# Altium PCB USBDM_Kinetis-CS.PcbDoc
Units mil, origin at the board's own origin, x right, y up, seen from the top; angles counter-clockwise.
Board outline 2329.41 x 820 mil, 2 copper layers (Top Layer, Bottom Layer); 60 components, 70 nets, 253 pads, 122 vias.
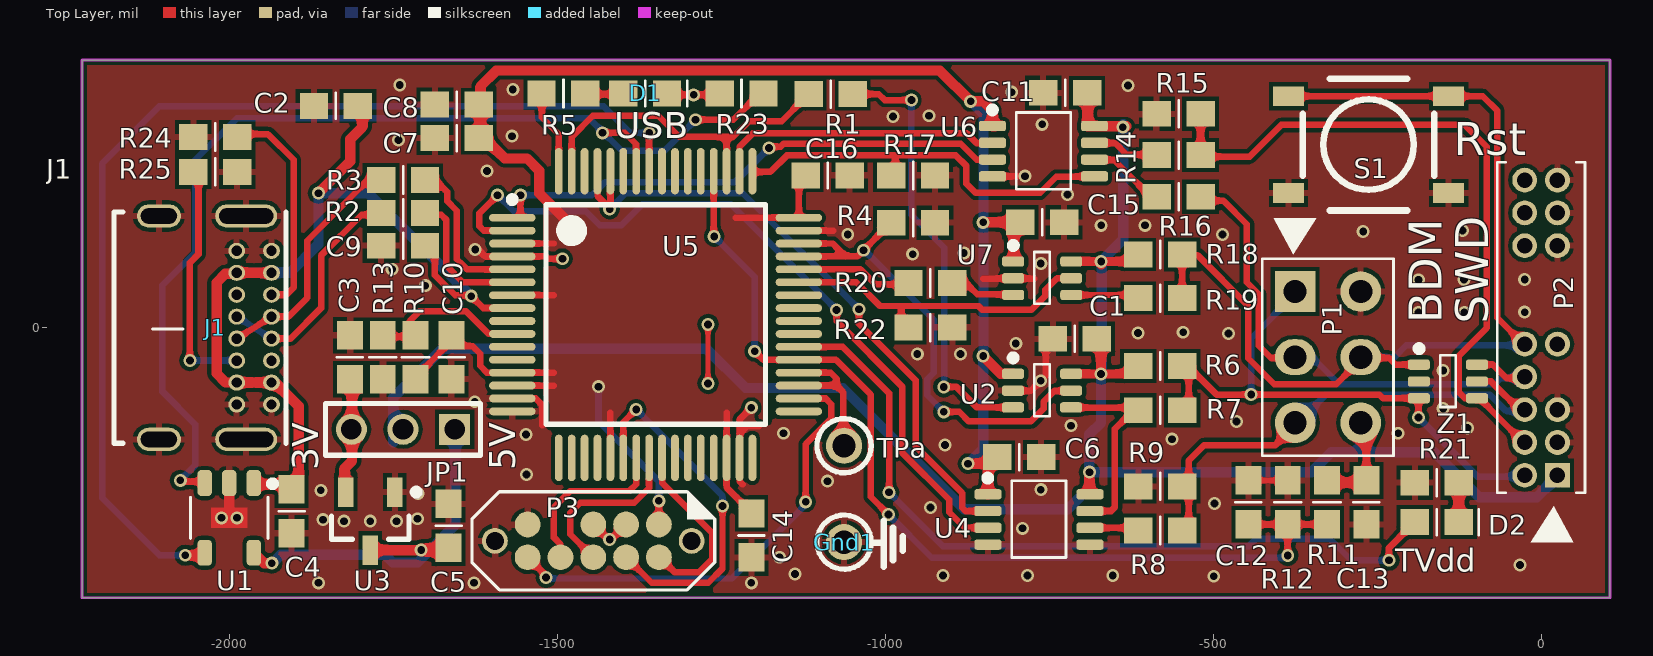
[diagram p0: Top Layer view]
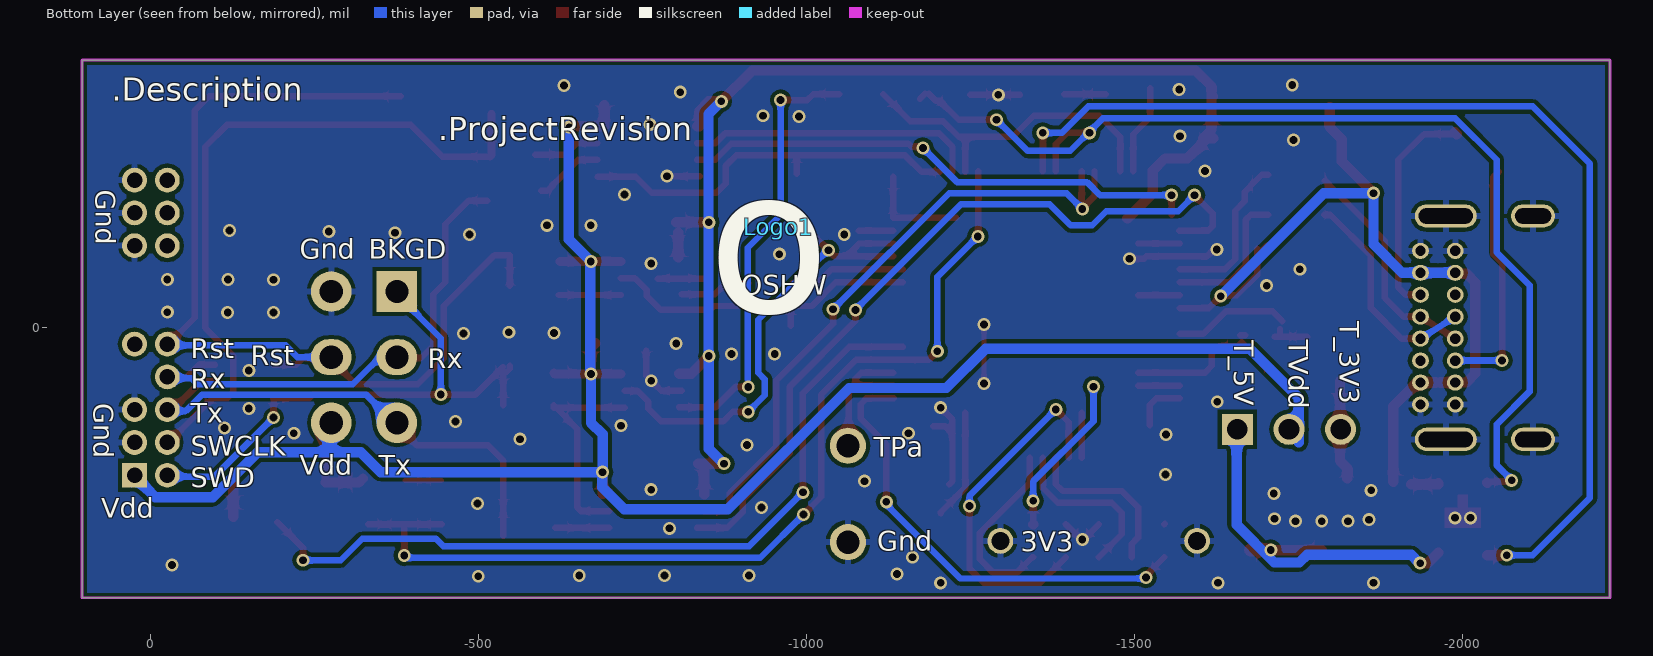
[diagram p1: Bottom Layer view, seen from below]
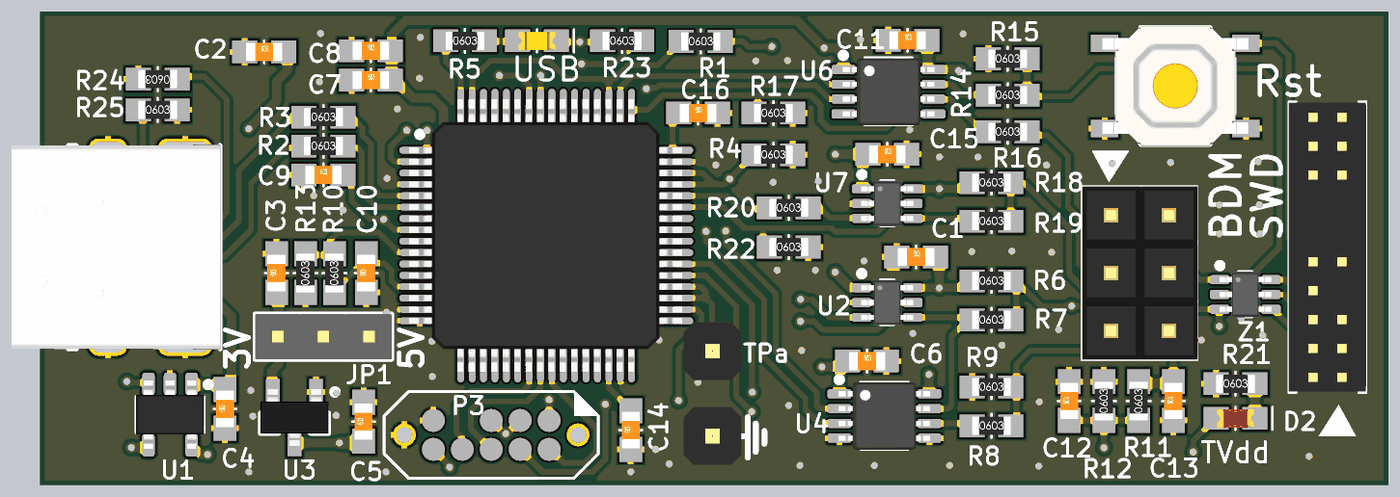
[diagram p2: 3D render of the assembled board from above, using the file's embedded part models]

## Layer stack, top to bottom
Top Solder: solder mask 0.4, Solder Resist, Dk 3.5
Top Layer: signal copper 1.4
Dielectric 1: dielectric 12.6, FR-4, Dk 4.8
Bottom Layer: signal copper 1.4
Bottom Solder: solder mask 0.4, Solder Resist, Dk 3.5

## Board outline
-2224.41,-411.97 105,-411.97 105,408.03 -2224.41,408.03

## Design rules (kind name [scope] priority, off if disabled: settings)
AssemblyTestPointUsage SilkToBoardRegionClearance_1 [All] p2:
AssemblyTestPointUsage SilkToBoardRegionClearance [All] p3:
Clearance [All] p1: gap=6 ignorepadtopadclearanceinfootprint=FALSE except(0: Arc-Hole Track-Hole SMDPad-Hole THPad-Hole Via-Hole Fill-Hole Poly-Hole Region-Hole Text-Hole)
HoleSize [All] p1: absolutevalues=TRUE maxlimit=250 minlimit=11.81 maxpercent=80.000 minpercent=20.000
MatchedLengths DiffPair_DIFF100MatchedLengths [InDifferentialPairClass('DIFF100')] p1: tolerance=6 checknetsindiffpair=TRUE checkdiffpairvsdiffpair=FALSE checkxsignals=FALSE checkothers=FALSE
MinimumAnnularRing [All] p1: minimumring=3
MinimumSolderMaskSliver [All] p1 off: minsoldermaskwidth=3.94
MinimumSolderMaskSliver SilkscreenOverComponentPads_2 [All] p2 off: minsoldermaskwidth=10
MinimumSolderMaskSliver SilkToSolderMaskClearance_1 [IsPad] p3 off: minsoldermaskwidth=10
MinimumSolderMaskSliver SilkscreenOverComponentPads_1 [All] p4 off: minsoldermaskwidth=10
MinimumSolderMaskSliver SilkToSolderMaskClearance [IsPad] p5 off: minsoldermaskwidth=10
MinimumSolderMaskSliver SilkscreenOverComponentPads [All] p6 off: minsoldermaskwidth=10
PlaneClearance [All] p1: clearance=10
PlaneConnect [All] p1: planeconnectstyle=Relief reliefexpansion=20 reliefentries=4 reliefconductorwidth=10 reliefairgap=6
PolygonConnect PolygonConnect_Via [IsVia] p1: connectstyle=Direct reliefconductorwidth=10 reliefentries=4 polygonreliefangle="90 Angle" airgapwidth=10
PolygonConnect [All] p2: connectstyle=Relief reliefconductorwidth=10 reliefentries=4 polygonreliefangle="90 Angle" airgapwidth=6
RoomDefinition USBDM_Kinetis [InComponentClass('USBDM_Kinetis')] p1: confinementstyle=ConfineIn formatcopy=TRUE lockcomponents=FALSE outline -2332.68,-429.13 116.14,-429.13 116.14,436.02 -2332.68,436.02
RoutingVias [All] p1: holewidth=12 width=25 viastyle="Through Hole" minholewidth=12 minwidth=25 maxholewidth=28 maxwidth=50
SilkToBoardRegionClearance SilkToBoardRegionClearance_2 [All] p1 off:
SilkToSilkClearance [All] p1 off: silktosilkclearance=10
SilkToSolderMaskClearance SilkToSolderMaskClearance_2 [IsPad] p1 off: minsilkscreentomaskgap=10 clearancetoexposedcopper=TRUE
SolderMaskExpansion [All] p1: expansion=4 istentingtop=FALSE
Width [All] p1: maxlimit=118.11 minlimit=5.91 preferedwidth=9.84
23 further rules are at their usual default settings.

## Components (designator, comment, footprint, x,y, rotation, side; value= is the part's Value field where it differs from the comment)
C1 "100nF" CCNP1608-0603 -710.83,-16.97 r0 top
C2 "10uF 10V" CCNP1608-0603 -1837.36,338.03 r0 top
C3 "4.7uF 16V" CCNP1608-0603 -1816,-45 r90 top
C4 "100nF" CCNP1608-0603 -1905,-279.97 r90 top
C5 "4.7uF 16V" CCNP1608-0603 -1665.64,-302.13 r90 top
C6 "100nF" CCNP1608-0603 -795.64,-197.34 r0 top
C7 "4.7uF 16V" CCNP1608-0603 -1653,289.03 r0 top
C8 "100nF" CCNP1608-0603 -1653,340.03 r0 top
C9 "100nF" CCNP1608-0603 -1735,125 r0 top
C10 "100nF" CCNP1608-0603 -1661,-45 r90 top
C11 "100nF" CCNP1608-0603 -725.64,358.03 r0 top
C12 "100nF" CCNP1608-0603 -446.27,-266.34 r90 top
C13 "4.7uF 16V" CCNP1608-0603 -266.27,-266.34 r90 top
C14 "100nF" CCNP1608-0603 -1203.95,-316.78 r90 top
C15 "100nF" CCNP1608-0603 -760.64,160.66 r0 top
C16 "100nF" CCNP1608-0603 -1087.64,232.03 r0 top
D1 "LED Green" LED1608-0603-GREEN -1366.01,357.03 r180 top
D2 "LED Red" LED1608-0603-RED -159.01,-296.34 r180 top
Gnd1 "TP" "PCBPIN - 0.9MM" -1062.64,-326.97 r0 top
J1 "USB4085-GF-A" ? -2094,0 r0 top
JP1 "Header 1x3 2mm" "HEADER 1X3 (2MM)" -1735,-155 r270 top
Logo1 "OSHW Logo" OSHW -957.01,153.03 r180 bottom
P1 "BDM Connector" BDM -375,55.03 r270 top
P2 "SWD-2x10 (reduced pins)" "SWD-2X10 - REDUCED" 25,-225 r90 top
P3 "SWD Connector 2x5-Pin" SWD-2X5-JIG-PADS -1345,-300 r180 top
R1 "1K" CR1608-0603 -1083.01,356.03 r0 top
R2 "33R0" CR1608-0603 -1735,175 r0 top
R3 "33R0" CR1608-0603 -1735,225 r0 top
R4 "10K" CR1608-0603 -957.45,160.03 r0 top
R5 "1K" CR1608-0603 -1490.45,357.03 r0 top
R6 "100K" CR1608-0603 -580.64,-58.34 r0 top
R7 "47R" CR1608-0603 -580.64,-125.97 r0 top
R8 "47R" CR1608-0603 -580.64,-309.34 r0 top
R9 "100K" CR1608-0603 -580.64,-241.97 r0 top
R10 "100K" CR1608-0603 -1716,-45 r90 top
R11 "10K" CR1608-0603 -326.27,-266.34 r90 top
R12 "10K" CR1608-0603 -386.27,-266.34 r90 top
R13 "0R" CR1608-0603 -1766,-45 r90 top
R14 "47R" CR1608-0603 -552.64,263.03 r0 top
R15 "100K" CR1608-0603 -552.64,326.03 r0 top
R16 "47R" CR1608-0603 -552.64,199.66 r0 top
R17 "10K" CR1608-0603 -957.45,232.03 r0 top
R18 "100K" CR1608-0603 -580.64,111.66 r0 top
R19 "47R" CR1608-0603 -580.64,45.03 r0 top
R20 "1K" CR1608-0603 -931,68.03 r0 top
R21 "1K" CR1608-0603 -159.01,-236.34 r0 top
R22 "10K" CR1608-0603 -931,0.03 r0 top
R23 "10K" CR1608-0603 -1219.01,357.03 r0 top
R24 "5.1K" CR1608-0603 -2021.34,290.72 r180 top
R25 "5.1K" CR1608-0603 -2021.34,237.55 r0 top
S1 "SMD-SW-4_5.1x5.1x2.0_M" SMD-SW-4_5.1x5.1x2.0_M -263.01,279.03 r0 top
TPa "TP" "PCBPIN - 0.9MM" -1062.64,-180 r0 top
U1 "MIC2005A-1YM5-TR" SOT23-5-Power -2000,-289.97 r90 top
U2 "SN74LVC1T45DCKT" SC70_N -760.83,-95.97 r0 top
U3 "XC6206P332MR" SOT23_N -1785,-295 r90 top
U4 "SN74LVC2T45DCTR" SSOP8_N -765.64,-292.34 r0 top
U5 "MK22FN512VLH12" TSQFP50P1200X1200-64N -1350,20 r0 top
U6 "SN74LVC2T45DCTR" SSOP8_N -758.64,269.03 r0 top
U7 "SN74LVC1T45DCKT" SC70_N -760.64,75.38 r0 top
Z1 "SMF05CT1G" SC70_N -142.01,-81.97 r0 top

## Footprints (in the part's own frame and the unit in brackets; to place one, negate y for a bottom-side part, rotate by r counter-clockwise, add the part's x,y. Pads: shape width x height; smd on the part's side, far side on the other; paste and mask are expansions set on the pad)
BDM [mil] "HCS12 style BDM connector"
  rect 62x62 hole 35.43: 1(0,0)
  round 62 hole 35.43: 2(0,100) 5(200,0) 6(200,100)
  oval 55x62 hole 35.43: 3(100,0) 4(100,100)
  silkscreen extent -112,-50 250,150, body extent -50,-49 250,151, height 333
CCNP1608-0603 [mm]
  rect 1.1x1 smd: 1(-0.85,0) 2(0.85,0)
  silkscreen extent 0,-0.5 0,0.5, body extent -0.8,-0.4 0.8,0.4, height 0.3
CR1608-0603 [mm]
  rect 1.1x1 smd: 1(-0.85,0) 2(0.85,0)
  silkscreen extent 0,-0.53 0,0.53, body extent -0.85,-0.4 0.85,0.4, height 0.56
"HEADER 1X3 (2MM)" [mm]
  rect 1.2x1.2 hole 0.8: 1(0,2)
  round 1.2 hole 0.8: 2(0,0) 3(0,-2)
  silkscreen extent -1,-3 1,3, body extent -1,-3 1,3, height 5
LED1608-0603-GREEN [mm] "SMT-LED 0603"
  rect 1.1x1 smd: A(0.85,0) K(-0.85,0)
  silkscreen extent -1.62,-0.5 0,0.5, body extent -0.8,-0.4 0.8,0.4, height 0.7
LED1608-0603-RED [mm] "SMT-LED 0603"
  rect 1.1x1 smd: A(0.85,0) K(-0.85,0)
  silkscreen extent -1.62,-0.5 0,0.5, body extent -0.8,-0.4 0.8,0.4, height 0.7
OSHW [mil] "OSHW Logo"
"PCBPIN - 0.9MM" [mm]
  round 1.4 hole 0.9: 1(0,0)
  silkscreen extent -1.05,-1.05 1.05,1.05, body extent -1.27,-1.27 1.27,1.27, height 6
SC70_N [mm] "SC70, 6-Leads, Body 2.15x1.4mm, Pitch 0.65mm, IPC Medium Density"
  rrect50% 0.85x0.4 smd: 1(-1.125,0.65) 2(-1.125,0) 3(-1.125,-0.65) 4(1.125,-0.65) 5(1.125,0) 6(1.125,0.65)
  silkscreen extent -1.24,-0.99 0.3,1.39, body extent -1.14,-1 1.14,1, height 1.1
SMD-SW-4_5.1x5.1x2.0_M [mm] "Miniature SMD PCB Push Button - C318888"
  rect 1.2x0.762 smd: 1(3.1,-1.875) 1b(-3.1,-1.875) 2(3.1,1.875) 2b(-3.1,1.875)
  silkscreen extent -2.55,-2.55 2.55,2.55, body extent -3.2,-2.65 3.2,2.65, height 2
SOT23-5-Power [mm]
  rrect50% 1x0.55 smd: 1(1.35,-0.95) 2(1.35,0) 3(1.35,0.95) 4(-1.35,0.95) 5(-1.35,-0.95)
  Top Layer region: 0.9,-0.2 0.9,0.2 -0.1,0.2 -0.1,-0.2
  Top Layer region: 0.4,0.7 -0.4,0.7 -0.4,-0.7 0.4,-0.7
  silkscreen extent -0.8,-1.8 1.45,1.5, body extent -1.5,-1.5 1.5,1.5, height 1.45
SOT23_N [mm] "SOT23, 3-Leads, Body 2.9x1.3mm, Pitch 0.95mm, Lead Span 2.3mm - IPC Medium Density"
  rect 1.15x0.6 smd: 1(1.125,-0.95) 2(1.125,0.95) 3(-1.125,0)
  silkscreen extent -0.7,-1.9 1.25,1.5, body extent -1.25,-1.5 1.25,1.5, height 1.05
SSOP8_N [mm] "SSOP, 8-Leads, Body 2.9x3.2mm, Pitch 0.65mm, IPC Medium Density"
  rrect50% 1.05x0.4 smd: 1(-1.975,0.975) 2(-1.975,0.325) 3(-1.975,-0.325) 4(-1.975,-0.975) 5(1.975,-0.975) 6(1.975,-0.325) 7(1.975,0.325) 8(1.975,0.975)
  silkscreen extent -2.11,-1.47 1.05,1.73, body extent -2.01,-1.47 2.01,1.48, height 1.3
SWD-2X5-JIG-PADS [mm] "Connector; SWD; 2x5 Position"
  round 1 hole 0.7: 0(-1.27,0.635) 0(6.35,0.635)
  round 1 smd: 1(0,0) 2(0,1.27) 3(1.27,0) 4(1.27,1.27) 5(2.54,0) 6(2.54,1.27) 8(3.81,1.27) 9(5.08,0) 10(5.08,1.27)
  silkscreen extent -2.16,-1.26 7.24,2.53
"SWD-2X10 - REDUCED" [mm] "Connector; SWD; 2x10 Position"
  rect 0.96x0.96 hole 0.6: 1(0,0)
  round 0.96 hole 0.6: 2(0,1.27) 3(1.27,0) 4(1.27,1.27) 5(2.54,0) 6(2.54,1.27) 8(3.81,1.27) 9(5.08,0) 10(5.08,1.27) 15(8.89,0) 16(8.89,1.27) 17(10.16,0) 18(10.16,1.27) 19(11.43,0) 20(11.43,1.27)
  silkscreen extent -2.6,-1.06 12.11,2.34, body extent -0.64,-1.06 12.06,2.34, height 4.5
TSQFP50P1200X1200-64N [mm] "Thin QFP, 64-Leads, Body 10x10mm, Pitch 0.5mm, IPC Medium Density"
  oval 1.8x0.3 smd: 1(-5.55,3.75) 2(-5.55,3.25) 3(-5.55,2.75) 4(-5.55,2.25) 5(-5.55,1.75) 6(-5.55,1.25) 7(-5.55,0.75) 8(-5.55,0.25) 9(-5.55,-0.25) 10(-5.55,-0.75) 11(-5.55,-1.25) 12(-5.55,-1.75) 13(-5.55,-2.25) 14(-5.55,-2.75) 15(-5.55,-3.25) 16(-5.55,-3.75) 33(5.55,-3.75) 34(5.55,-3.25) 35(5.55,-2.75) 36(5.55,-2.25) 37(5.55,-1.75) 38(5.55,-1.25) 39(5.55,-0.75) 40(5.55,-0.25) 41(5.55,0.25) 42(5.55,0.75) 43(5.55,1.25) 44(5.55,1.75) 45(5.55,2.25) 46(5.55,2.75) 47(5.55,3.25) 48(5.55,3.75)
  oval 0.3x1.8 smd: 17(-3.75,-5.55) 18(-3.25,-5.55) 19(-2.75,-5.55) 20(-2.25,-5.55) 21(-1.75,-5.55) 22(-1.25,-5.55) 23(-0.75,-5.55) 24(-0.25,-5.55) 25(0.25,-5.55) 26(0.75,-5.55) 27(1.25,-5.55) 28(1.75,-5.55) 29(2.25,-5.55) 30(2.75,-5.55) 31(3.25,-5.55) 32(3.75,-5.55) 49(3.75,5.55) 50(3.25,5.55) 51(2.75,5.55) 52(2.25,5.55) 53(1.75,5.55) 54(1.25,5.55) 55(0.75,5.55) 56(0.25,5.55) 57(-0.25,5.55) 58(-0.75,5.55) 59(-1.25,5.55) 60(-1.75,5.55) 61(-2.25,5.55) 62(-2.75,5.55) 63(-3.25,5.55) 64(-3.75,5.55)
  silkscreen extent -5.67,-4.25 4.25,4.57, body extent -6.02,-6 5.98,6, height 1.6
? [mm] "USB-C Connector"
  oval 0.65x0.62 hole 0.4: A1(4.025,2.975) A4(4.025,2.125) A5(4.025,1.275) A6(4.025,0.425) A7(4.025,-0.425) A8(4.025,-1.275) A9(4.025,-2.125) A12(4.025,-2.975) B1(2.675,-2.975) B4(2.675,-2.125) B5(2.675,-1.275) B6(2.675,-0.425) B7(2.675,0.425) B8(2.675,1.275) B9(2.675,2.125) B12(2.675,2.975)
  oval 1.7x0.9 hole 0.6 slot 1.4 at 0 deg: SH(-0.335,-4.325) SH(-0.335,4.325)
  oval 2.4x0.9 hole 0.6 slot 2.1 at 0 deg: SH(3.045,-4.325) SH(3.045,4.325)
  silkscreen extent -2.07,-4.47 4.58,4.47, body extent -4.56,-4.52 4.61,4.51, height 3.46

## Part data
C1 C4 C6 C8 C9 C10 C11 C12 C14 C15 C16: library part Cap_CCNP_0603_100nF, "Capacitor non-polar SMT 0603", LCSC=C14663, Manufacturer="Generic Components", Class=Passive, Published=08/06/2000, Publisher="Altium Hobart Technology Centre", SubClass=Capacitor
C2: library part Cap_CCNP_0603, "Capacitor non-polar SMT 0603", LCSC=C19702, Manufacturer="Generic Components", Class=Passive, Published=08/06/2000, Publisher="Altium Hobart Technology Centre", SubClass=Capacitor
C3 C5 C7 C13: library part Cap_CCNP_0603, "Capacitor SMT 0603", LCSC=C19666, Manufacturer="Generic Components", Class=Passive, Published=08/06/2000, Publisher="Altium Hobart Technology Centre", SubClass=Capacitor
D1: library part LED-0603-Green, "LED 0603 Green", LCSC=C72043, Manufacturer="Generic Components", Class I=Optoelectronic, Class II=LED, Farnell PN=1581242, Published=8-Jun-2000, Publisher="Altium Limited", Revision="July-2002: Re-released for DXP Platform."
D2: library part LED-0603-Red, "LED 0603 Red", LCSC=C2286, Manufacturer="Generic Components", Class I=Optoelectronic, Class II=LED, Farnell PN=1581239, Published=8-Jun-2000, Publisher="Altium Limited", Revision="July-2002: Re-released for DXP Platform."
Gnd1 TPa: "Test Point"
J1: "USB-C, USB 2.0 Receptacle Connector 16 Position Through Hole, Right Angle", Digikey Part Number=2073-USB4085-GF-ACT-ND, Angle=90, Digikey=2073-USB4085-GF-ACT-ND, Digikey Link=https://www.digikey.ee/product-detail/en/gct/USB4085-GF-A/2073-USB4085-GF-ACT-ND/9859733, Farnell PN=2924867, Part Number=USB4085-GF-A
JP1: "Header, 1x3, 2mm", Manufacturer="Generic Components", Class I=Connector, Publisher="Altium Limited", Revision="July-2002: Re-released for DXP Platform."
P1: library part BDM2X3, "HCS BDM connector (2x3 0.1\")"
P2: library part SWD2X10-Reduced, "SWD Connector 2x10-Pin (reduced pins)", Farnell PN=1865289, LatestRevisionDate=17-Jul-2002, LatestRevisionNote="Re-released for DXP Platform.", Publisher="Altium Limited"
P3: library part SWD2X5_JIG, Farnell PN=1865285, LatestRevisionDate=17-Jul-2002, LatestRevisionNote="Re-released for DXP Platform.", Publisher="Altium Limited"
R1 R5 R20 R21: library part Res, "Resistor SMT 0603", LCSC=C21190, Manufacturer="Generic Components", Class=Passive, Published=08/06/2000, Publisher="Altium Hobart Technology Centre", SubClass=Resistor
  R1 R20: Farnell PN=2331727
  R5 R21: Farnell PN=2502447
R2 R3: library part Res, "Resistor SMT 0603", LCSC=C23140, Manufacturer="Generic Components", Class=Passive, Farnell PN=1632431, Published=08/06/2000, Publisher="Altium Hobart Technology Centre", SubClass=Resistor
R4 R11 R12 R17 R22 R23: library part Res, "Resistor SMT 0603", LCSC=C25804, Manufacturer="Generic Components", Class=Passive, Farnell PN=1799366, Published=08/06/2000, Publisher="Altium Hobart Technology Centre", SubClass=Resistor
R6 R9 R15 R18: library part Res, "Resistor SMT 0603", LCSC=C25803, Manufacturer="Generic Components", Class=Passive, Farnell PN=9238727, Published=08/06/2000, Publisher="Altium Hobart Technology Centre", SubClass=Resistor
R7 R8 R14 R16 R19: library part Res, "Resistor SMT 0603", LCSC=C23182, Manufacturer="Generic Components", Class=Passive, Farnell PN=1646283, Published=08/06/2000, Publisher="Altium Hobart Technology Centre", SubClass=Resistor
R10: library part Res_CR0603, "Resistor SMT 0603", LCSC=C25803, Manufacturer="Generic Components", Class=Passive, Farnell PN=9238727, Published=08/06/2000, Publisher="Altium Hobart Technology Centre", SubClass=Resistor
R13: library part Res_CR0603, "Resistor SMT 0603", LCSC=C21189, Manufacturer="Generic Components", Class=Passive, Farnell PN=2668260, Published=08/06/2000, Publisher="Altium Hobart Technology Centre", SubClass=Resistor
R24 R25: library part Res_CR0603, "Resistor SMT 0603", LCSC=C23186, Manufacturer="Generic Components", Class=Passive, Published=08/06/2000, Publisher="Altium Hobart Technology Centre", SubClass=Resistor
S1: library part SW_PB-TS, "Tactile Switch SPST 5.10mm X 5.10mm / (1.5mm=C318884) / (2.0mm=C318888) / (3.5mm=C318886)", LCSC=C318888, Revision=1.0
U1: "Power Switch 0.5A, active-high enable", LCSC=C81399
U2 U7: "Dual voltage bidirection buffer", LCSC=C80768, Farnell PN=9592733
U3: "3V3 200mA, LDO regulator (Low ESR ceramic caps)", LCSC=C5446, Farnell PN=8796980
U4 U6: "Dual voltage bidirection buffer", LCSC=C22672, Farnell PN=2008640
U5: library part MK22FN1M0VLH12, "Arm Cortex M4F", Farnell PN=2434224
Z1: "TVS DIODE ARRAY, 100W, 5V, SC-70", LCSC=C15879, Digikey=SMF05CT1GOSCT-ND, Farnell PN=2533147

## Via types
v1: diameter 19.68, hole 11.81, Top Layer to Bottom Layer, tented both sides, 122 vias

## Nets (pads, with @x,y where several pads share a name; then routed paths per layer and width w, separated by ;. In a path a pad name is that pad's centre, name@x,y a point inside that pad or via, vN(x,y) a via of type N, cw(c..) or ccw(c..) an arc to the next point about the centre after c; other vN are vias at no path point)
3V3: C6.1 C7.2 C8.2 C10.2 C14.2 C15.1 C16.1 P3.1 R10.1 U2.1 U4.1 U5.3 U5.7 U5.13 U5.14 U5.21 U5.30 U5.48 U6.1 U7.1 | length 3040.9
  Top Layer w9.84: R10.1@-1714,-73.26 -1663,-22.26 -1656.99,-28.27 -1629.08,-28.27 -1617.44,-39.92 -1617.44,-58.17 -1607.06,-68.55 U5.13 -1505,-68.55 ; C10.2@-1668.36,-11.54 C10.2 ; U5.14 -1505,-88.24 ; U5.7 -1505,49.56 ; U5.3@-1568.5,128.3 -1505,128.3 ; U5.21 -1418.9,-129.97 ; -1241.73,-129.97 U5.30 -1241.73,-243.57 -1203.95,-281.35 C14.2 ; -1228,167.67 U5.48 C16.1@-1131.5,230.03
  Top Layer w10: P3.1@-1345.47,-299.5 -1345,-299.02 v1(-1345,-264)
  Top Layer w15.75: C7.2 -1611.29,289.03 C7.2@-1604.54,282.28 ; C8.2@-1619.35,353.03 C8.2@-1617,355.38 ; -1488.65,166.39 -1527.15,204.89 -1527.15,239.17 -1546.01,258.03 -1580.29,258.03 C7.2@-1604.54,282.28 ; P3.1@-1345.47,-299.5 P3.1 ; v1(-873.64,-207.34) C6.1@-834.1,-207.34 ; v1(-850.64,-43.34) -823.6,-70.38 U2.1 ; v1@-850.64,160.81 C15.1@-800.55,160.81 ; U4.1 C6.1@-843.39,-208.88 ; U6.1@-836.39,307.05 U6.1@-832.57,307.05 ; U6.1 -836.39,331.03 -850.39,345.03 v1(-869.64,345.03) -916.64,392.03 -1592.69,392.03 -1617,367.72 C8.2@-1617,355.38 ; U7.1@-803.94,107.05 C15.1@-803.94,144.66 ; C8.2@-1617,355.38 -1617,301.5 -1604.54,289.03 C7.2@-1604.54,282.28
  Bottom Layer w10: v1(-1437,-89.97) -1437,-142.61 -1345,-234.61 v1(-1345,-264)
  Bottom Layer w15.75: v1(-873.64,-207.34) -850.64,-184.34 v1(-850.64,-43.34) v1@-850.64,-36.34 ; v1(-869.64,345.03) -850,325.39 v1@-850,-36.34
  other v1: -850.64,160.66
5V: C2.2 C4.2 C9.2 J1.A4 J1.A9 J1.B4 J1.B9 U1.1 U5.8 | length 1401.6
  Top Layer w9.84: C9.2@-1701.71,120 -1696.54,120 -1699.12,122.59 C9.2 ; C9.2@-1686.36,120.03 -1686.36,80.13 -1655.61,49.37 -1632.37,49.37 v1(-1631,48) -1612.87,29.87 U5.8
  Top Layer w15.75: U1.1 -1962.6,-238.82 C4.2@-1921.32,-238.82 ; J1.A4 J1.B9 -1990.34,82 -2006.09,82 -2019.2,68.9 -2019.2,-69.88 -2005.42,-83.66 J1.B4 J1.A9 -1930.12,-83.66 -1893.9,-119.88 C4.2@-1893.9,-235.4 ; v1(-1864.01,205.03) -1815.64,253.4 -1815.64,287.19 -1797.01,305.81 C2.2@-1797.01,336.03
  Bottom Layer w15.75: J1.B9 J1.A4 -1907.34,83.66 -1864.01,126.99 v1(-1864.01,205.03) -1788.03,205.03 v1(-1631,48)
ADC0_DP0: U5.9
ADC1_DM0: U5.12
ADC1_DP0: U5.11
BKGD/SWD_DIR: R4.1 U2.5 U5.45 U5.46 | length 767
  Top Layer w9.84: U5.45 -1060.22,108.61 ; U5.46@-1131.5,128.3 -1079.91,128.3 -1060.22,108.61 ; R4.1 v1(-1032.91,118.03) -1042.33,108.61 -1060.22,108.61 ; v1(-910.64,-128.34) -887.27,-128.34 -872.64,-142.97 -777.83,-142.97 -758.18,-123.33 -758.18,-112.52 -741.84,-96.17 U2.5@-722.52,-96.17
  Bottom Layer w9.84: v1@-1032.28,118.67 -925.84,12.24 -925.84,-68.77 -936.04,-78.97 -936.04,-102.93 v1(-910.64,-128.34)
BKGD/SWD_I: U4.2 U5.60 U5.61 | length 995.4
  Top Layer w9.84: U5.61 -1438.58,237.55 -1438.58,200.72 -1418.9,181.03 U5.60 ; v1(-1040.01,28.03) -1040.01,6.03 -953.64,-80.34 -953.64,-180.97 -882.42,-252.19 -882.42,-274.55 -877.43,-279.54 U4.2
  Bottom Layer w9.84: v1(-1420.01,181.03) -1396.01,205.03 -1217.01,205.03 v1(-1040.01,28.03)
BKGD/SWD_O: R1.1 U5.51 U5.63 | length 520.7
  Top Layer w9.84: U5.63 -1477.95,290.72 -1445.64,323.03 -1346.01,323.03 -1314.01,291.03 -1241.73,291.03 ; U5.51@-1241.73,237.55 -1241.73,291.03 ; R1.1 -1157.6,314.91 -1207.7,314.91 -1231.57,291.03 -1241.73,291.03
DAC_OUT: U5.18
DBG_RX: U4.3 U5.2 | length 1187.5
  Top Layer w9.84: v1(-1591.01,202.03) -1618.5,174.54 -1618.5,154.69 -1611.79,147.98 -1568.5,147.98 U5.2@-1567.52,147.98 ; v1(-1074.01,27.03) -1074.01,10.03 -973.64,-90.34 -973.64,-191.04 -902.23,-262.45 -902.23,-281.38 -878.47,-305.13 U4.3 U4.3@-832.57,-305.13
  Bottom Layer w9.84: v1(-1591.01,202.03) -1590.54,202.03 -1566.12,177.61 -1456.59,177.61 -1435.01,156.03 -1402.01,156.03 -1370.01,188.03 -1235.01,188.03 v1(-1074.01,27.03)
DBG_TX: U5.1 U6.3 | length 796
  Top Layer w9.84: U5.1@-1556.01,172.03 v1(-1556.01,202.03) ; v1(-1177.01,274.03) -1175.12,275.91 -1159.41,275.91 -1155.01,280.32 -884.73,280.32 -860.28,255.87 U6.3@-832.57,255.87
  Bottom Layer w9.84: v1(-1556.01,202.03) -1447.01,202.03 -1427.01,222.03 -1229.01,222.03 v1(-1177.01,274.03)
DM: J1.A7 J1.B7 R2.1 | length 334.9
  Top Layer w9.84: J1.A7 -1906.58,-16.73 -1860.01,29.84 -1860.01,110.03 -1798.01,172.03 R2.1@-1788.64,172.03
  Bottom Layer w9.84: J1.B7 J1.A7
DP: J1.A6 J1.B6 R3.1 | length 345.6
  Top Layer w9.84: J1.B6 J1.A6 -1909.76,16.73 -1881.13,45.36 -1881.13,132.53 R3.1@-1789.64,224.03
EXTAL: U5.33
EXTAL32: U5.20
GND: C1.1 C2.1 C3.2 C4.1 C5.2 C6.2 C7.1 C8.1 C9.1 C10.1 C11.1 C12.2 C13.1 C14.1 C15.2 C16.2 D1.K Gnd1.1 J1.A1 J1.A12 J1.B1 J1.B12 J1.SH P1.2 P2.3 P2.5 P2.15 P2.17 P2.19 P3.0 P3.3 P3.5 P3.9 R4.2 R9.1 R12.2 R13.1 R15.1 R17.2 R21.1 R22.2 R23.1 R24.2 R25.2 S1.1 S1.1b U1.2 U2.2 U3.1 U4.4 U4.5 U5.4 U5.15 U5.16 U5.31 U5.47 U6.4 U7.2 Z1.2 | length 977.4
  Top Layer w7.87: v1(-1270,-84.97) v1(-1270,5.03) ; C12.2@-443.27,-232.88 R12.2@-387.27,-232.88
  Top Layer w9.84: v1@-1620.8,119.82 -1609.59,108.61 U5.4 -1517.59,108.61 -1514.01,105.03 v1(-1492.01,105.03) ; U5.15 -1532.6,-107.92 -1522.64,-117.88 -1522.64,-148.97 ; v1(-1546.64,-223.97) v1@-1545.82,-224.79 ; P3.9@-1545.82,-299.15 P3.9 ; P3.5 -1420.01,-324.96 P3.3 ; D1.K@-1324.98,355.03 v1(-1292.01,355.03) R23.1@-1249.47,355.03 ; U5.31@-1222.05,-197.49 -1222.05,-161.38 ; -1217.05,-238.98 -1222.05,-233.98 U5.31 -1222.05,-161.38 ; v1(-1204.01,-121.97) -1222.05,-140.01 -1222.05,-161.38 ; -1192.83,-149.97 -1210.64,-149.97 -1222.05,-161.38 ; U5.47@-1131.5,147.98 -1079.21,147.98 ; -850.61,74.74 -772.82,74.74 ; U6.4 -798.25,230.64 ; U2.2@-809.13,-96.17 -778.03,-96.17 v1(-762.83,-80.97) -755.11,-73.25 -755.11,-62.77 C1.1@-755.09,-34.77
  other v1: -1864.01,-388.97 -1627.01,-388.97 -1204.01,-388.97 -499.01,-378.97 -911.64,-377.95 -783.01,-377.95 -653.01,-377.97 -1137.5,-375.35 -32.01,-361.97 -1161.02,-350 -1420,-323 -790.64,-305.97 -1825,-295 -1785,-295 -1745,-295 -1857.01,-292.66 -1712.87,-291.34 -2011.81,-289.97 -1988.19,-289.97 -931.01,-273.97 -498.01,-267.97 -1712.01,-252.97 -1860.37,-248.01 -762.64,-246.97 -1087.81,-233.98 -908.64,-178.97 -562.64,-169.97 -1547.64,-162.97 -1155.01,-160.97 -217.95,-160.97 -112.01,-152.79 -716.64,-149.34 -464.4,-142.98 -149.27,-123.33 -1625.64,-112.97 -149.27,-65.29 -951.01,-39.97 -885.01,-39.97 -800.83,-23.97 -476.64,-8.97 -614.64,-7.97 -545.64,-6.97 -187.01,23.03 -117.01,23.03 -25.01,23.62 -1701,64 -187.01,73.03 -117.68,73.33 -25.01,73.33 -1751.64,89.03 -762.64,97.66 -958.01,112.03 -880.01,114.03 -1625.01,119.03 -1057.01,142.03 -485.64,142.03 -372.01,144.66 -271.27,146.64 -119.87,148.03 -670.64,156.03 -604.01,156.03 -722.01,203.03 -786.64,231.03 -1607.01,239.03 -1742.01,286.03 -1569.01,292.03 -760.64,310.03 -988.01,322.03 -933.01,323.03 -807.01,359.03 -1567.64,363.03 -629.64,369.03 -1740.01,370.03
ID: R10.2 R13.2 U5.10 | length 236.5
  Top Layer w9.84: R13.2@-1763,-13.5 R10.2@-1713,-13.5 ; R10.2@-1725,10.03 -1710,25.03 -1639.03,25.03 -1604.5,-9.5 U5.10@-1568.5,-9.5 ; R10.2@-1721.36,-11.54 R10.2@-1721.36,-2
LED: D2.A U5.38 | length 1221.5
  Top Layer w9.84: U5.38@-1146.5,-29.18 -1146.29,-29.39 -1064.59,-29.39 -994,-99.98 v1(-994,-250.97) ; v1(-232.01,-354.62) -232.01,-335.88 D2.A
  Bottom Layer w9.84: v1(-994,-250.97) -912,-332.97 -445.64,-332.97 -434.64,-321.97 -322.01,-321.97 -289.35,-354.62 v1(-232.01,-354.62)
NetD1_A: D1.A R5.2 | length 63.1
  Top Layer w9.84: R5.2@-1455.54,356.03 D1.A@-1392.46,356.03
NetD2_K: D2.K R21.2 | length 56
  Top Layer w15.75: D2.K@-125.54,-288.34 R21.2@-125.54,-232.34
NetJ1_A5: J1.A5 R24.1 | length 342.7
  Top Layer w9.84: R24.1@-1990.94,295.07 -1941.05,295.07 -1901.77,255.8 -1901.77,61.23 -1912.8,50.2 J1.A5
  Top Layer w15.75: R24.1@-1990.94,295.07 R24.1@-1987.87,298.14
NetJ1_B5: J1.B5 R25.1 | length 367.7
  Top Layer w10: v1(-2060,-50) -2060,99 -2046.87,112.13 -2046.87,229.62 R25.1
  Bottom Layer w10: v1(-2060,-50) -1988.88,-50 J1.B5
NetR1_2: R1.2 U2.3 | length 658.4
  Top Layer w9.84: R1.2 -1009.81,356.03 -1000.81,347.03 v1(-960.01,347.03) ; v1(-910.64,-90.34) -891.27,-90.34 -860.05,-121.56 U2.3
  Bottom Layer w9.84: v1(-960.01,347.03) -960.01,172.04 -910,122.03 -910,-78.97
NetR7_1: R7.1 U2.4 U4.7 | length 329.7
  Top Layer w9.84: U2.4@-722.52,-121.76 R7.1@-614.29,-121.76 ; U4.7@-698.71,-279.54 -655.64,-279.54 -649.64,-273.54 -649.64,-153.87 R7.1@-614.1,-118.34
NetR8_1: R8.1 U4.6 | length 82.4
  Top Layer w9.84: U4.6@-698.71,-305.13 R8.1@-616.31,-305.13
NetR14_1: R14.1 U6.7 | length 102.2
  Top Layer w9.84: U6.7@-680.88,281.46 -649.36,281.46 -631.57,263.66 R14.1@-586.1,263.66
NetR16_1: R16.1 U6.6 | length 105.3
  Top Layer w9.84: U6.6@-680.88,255.87 -651.47,255.87 -604.27,208.66 R16.1@-595.1,208.66
NetR19_1: R19.1 U7.4 | length 94.4
  Top Layer w9.84: U7.4 R19.1@-621.98,49.79
NetR20_2: R20.2 U7.3 | length 108.7
  Top Layer w9.84: R20.2@-910.54,68.03 -876.8,68.03 -859.64,50.87 U7.3@-808.94,50.87
PTA4: U5.26
PTA5: U5.27
PTA12: U5.28
PTA13: U5.29
PTB16: U5.39
PTB17: U5.40
PTB18: U5.41
PTB19: U5.42
PTC8: U5.53
PTC9: U5.54
PTC10: U5.55
PTC11: U5.56
PTD2: U5.59
PTD5: U5.62
RESETB: P3.10 U5.34 | length 709.1
  Top Layer w9.84: P3.10 -1517,-377.97 v1(-1517,-381) ; U5.34@-1132.48,-107.92 -1090.69,-107.92 -1082,-116.61 -1082,-138.33 -1121.1,-177.43 -1121.1,-265.43 v1(-1121.16,-265.49)
  Bottom Layer w9.84: v1(-1517,-381) -1515.61,-382.39 -1233.88,-382.39 -1121.16,-269.67 v1(-1121.16,-265.49)
RST_DIR: R22.1 U5.43 U7.5 | length 501.3
  Top Layer w9.84: U5.43@-1146.5,69.24 -1044.22,69.24 -1008.01,33.03 -975.46,33.03 -857.64,33.03 -851.64,27.03 -777.4,27.03 -755.64,48.79 -755.64,57.66 -737.92,75.38 U7.5 ; R22.1@-975.46,3.03 -975.46,31.5
RST_IO: R20.1 U5.44 | length 179.3
  Top Layer w9.84: U5.44@-1146.5,88.93 U5.44 -1037.64,88.93 -1014.74,66.03 -979.46,66.03 R20.1@-977.46,68.03
SWCLK_O: U5.50 U6.2 | length 442.3
  Top Layer w9.84: U5.50@-1222.05,237.55 -1222.05,275.95 -1201.84,296.16 -875.39,296.16 -860.69,281.46 -843.39,281.46 U6.2@-832.57,281.46
SWD_CLK: P3.4 U5.22 | length 551.3
  Top Layer w9.84: U5.22 -1399.21,-144.18 v1(-1379.64,-124.61) ; P3.4 -1356.03,-388.97 -1269.7,-388.97 -1248,-367.26 v1(-1248,-272)
  Bottom Layer w9.84: v1(-1379.64,-124.61) -1248,-256.25 v1(-1248,-272)
SWD_DIO: P3.2 U5.25 | length 285.3
  Top Layer w9.84: P3.2 -1343.65,-350 -1320.52,-373.13 -1283.8,-373.13 -1263.84,-353.17 -1263.84,-312.84 -1340.16,-236.53 U5.25
SWD_EN: R17.1 U5.49 U6.5 | length 610.1
  Top Layer w9.84: U5.49@-1202.36,237.55 -1174.85,237.55 -1149.77,262.64 -984.46,262.64 ; R17.1@-984.46,234.62 -984.46,262.64 ; U6.5@-680.88,230.27 -739.02,230.27 -763.64,205.66 -862.27,205.66 -876.14,219.53 -876.14,246.53 -892.64,263.03 -984.46,263.03 -984.46,262.64
SWD_RX: P3.8 U5.23 | length 260.3
  Top Layer w9.84: P3.8 -1495,-329.97 -1505,-319.97 -1505,-273.97 -1480,-248.97 -1390,-248.97 -1379.53,-238.5 U5.23
SWD_TX: P3.6 U5.24 | length 263.9
  Top Layer w9.84: P3.6 -1480,-314.97 -1480,-281.97 -1465,-266.97 -1385,-266.97 -1384.81,-266.78 -1382.62,-266.78 -1359.84,-244 U5.24
T_BKGD/SWD: P1.1 P2.2 R6.2 R7.2 Z1.3 | length 845.6
  Top Layer w9.84: R6.2@-547.17,-62.75 R6.2 ; R6.2@-542.58,-67.34 R6.2@-537.17,-67.34 ; R7.2@-537.17,-118.34 R6.2@-537.17,-67.34 ; R6.2@-536.8,-66.97 R6.2@-537.17,-67.34 ; R6.2@-536.8,-59.97 -494.8,-101.97 v1(-442.01,-101.97) -246.57,-101.97 -240.98,-107.56 Z1.3 -187.01,-108.27 v1(-187.01,-136.97)
  Bottom Layer w9.84: v1(-442.01,-101.97) -442.01,-15.91 P1.1@-372.01,54.09 ; v1(-187.01,-136.97) -97.01,-226.97 P2.2@-25.01,-226.97
T_DBG_RX: P1.3 P2.8 R16.2 Z1.6 | length 786.9
  Top Layer w9.84: R16.2@-513.05,193.53 -484.3,193.53 -448.64,157.87 -448.64,69.3 -430.43,51.09 -430.43,-27.55 -412.07,-45.91 P1.3@-372.01,-45.91 ; Z1.6 -73.21,-56.38 -52.62,-76.97 P2.8@-25.01,-76.97
  Bottom Layer w9.84: P1.3@-372.01,-45.91 -348.07,-45.91 -307.85,-86.13 -71.05,-86.13 -61.89,-76.97 P2.8@-25.01,-76.97
T_DBG_TX: P1.5 P2.6 R8.2 R9.2 Z1.5 | length 773.2
  Top Layer w9.84: R8.2@-537.17,-317.34 -537.17,-202.5 -513.64,-178.97 -405.07,-178.97 P1.5@-372.01,-145.91 ; Z1.5 -76.21,-81.97 -31.21,-126.97 P2.6@-25.01,-126.97
  Bottom Layer w9.84: P1.5@-372.01,-145.91 -328.07,-101.97 -78.37,-101.97 -53.37,-126.97 P2.6@-27.01,-126.97 ; P2.6@-25.01,-126.97 P2.6@-27.01,-126.97 ; P2.6 P2.6@-27.01,-126.97
T_RST: P1.4 P2.10 R18.2 R19.2 S1.2 S1.2b Z1.1 | length 1513.3
  Top Layer w9.84: R19.2@-547.34,63.66 -547.34,110.67 -523.88,110.67 -446.27,33.05 -446.27,-46.71 -406.85,-86.13 -312.22,-86.13 -272.01,-45.91 -232.01,-45.91 -221.54,-56.38 Z1.1 ; S1.2b@-381.12,352.85 S1.2 -88.83,352.85 -67.01,331.03 -67.01,15.03 P2.10@-25.01,-26.97
  Bottom Layer w9.84: P1.4 -223.38,-44.97 -205.38,-26.97 P2.10@-25.01,-26.97
T_SWCLK: P2.4 R14.2 R15.2 Z1.4 | length 1058.9
  Top Layer w9.84: R14.2@-516.8,260.66 -444.47,260.66 -396.1,309.03 -116.01,309.03 -82.85,275.87 -82.85,-0.42 -125.54,-43.11 -125.54,-98.09 -116.07,-107.56 Z1.4 -94.42,-107.56 P2.4@-25.01,-176.97
  Top Layer w11.81: R15.2 R14.2 R14.2@-516.8,260.66
TPA: TPa.1 U5.35 U5.36 | length 207
  Top Layer w9.84: U5.35 -1074.37,-88.24 ; U5.36 -1083.06,-68.55 -1074.37,-77.24 -1074.37,-88.24 ; TPa.1@-1063.64,-161.97 -1063.64,-98.97 -1074.37,-88.24
USB_DM: R2.2 U5.6 | length 218.6
  Top Layer w9.84: R2.2@-1703.54,172.03 -1676.64,172.03 -1668.85,164.24 -1668.85,94.24 -1643.85,69.24 U5.6
USB_DP: R3.2 U5.5 | length 245.9
  Top Layer w9.84: R3.2@-1703.17,233.03 -1693.64,233.03 -1667.64,207.03 -1667.64,193.03 -1653.01,178.4 -1653.01,104.4 -1645.27,96.66 -1637.54,88.93 U5.5
USB_LED: R5.1 U5.64 | length 137.2
  Top Layer w9.84: R5.1@-1523.46,365.03 -1523.46,320.86 -1497.64,295.03 U5.64
VBDM: C12.1 R11.1 R12.1 U5.37 U5.52 | length 1486.4
  Top Layer w9.84: v1@-1261.42,148.25 U5.52 ; v1(-1199.01,-35.97) -1186.11,-48.87 U5.37 -1075.11,-48.87 -1022.01,-101.97 -1022.01,-257.97 v1(-995.01,-284.97) ; C12.1@-443.27,-299.8 R12.1 ; v1(-386.27,-347.23) R12.1 ; R11.1@-331.27,-299.8 R12.1
  Bottom Layer w9.84: v1(-1260.64,139.03) -1199.01,77.4 v1(-1199.01,-35.97) ; v1(-995.01,-284.97) -929.01,-350.97 -390.01,-350.97 v1(-386.27,-347.23)
VDD_BDM: C1.2 C11.2 C13.2 JP1.2 P1.6 P2.1 R6.1 R11.2 R18.1 U2.6 U4.8 U6.8 U7.6 | length 3193
  Top Layer w9.84: P1.6@-272.01,-145.91 P1.6@-266.27,-151.65
  Top Layer w11.81: C13.2 P1.6@-266.27,-151.65
  Top Layer w13.78: U2.6 -670.83,-70.38 -615.7,-70.38 R6.1@-614.29,-68.97 ; U7.6 -670.64,100.97 R18.1@-623.8,100.97
  Top Layer w15.75: C11.2@-691.32,339.51 -691.32,307.05 -632.25,307.05 -633.64,305.66 v1(-637.64,305.66) ; U4.8@-688.64,-253.2 v1(-688.64,-220.34) ; C1.2@-677.36,-23.97 -670.83,-30.5 -670.83,-70.38 v1(-670.83,-70.58) ; v1@-670.64,96.66 -670.64,100.97 v1(-670.64,101.03) ; R11.2@-323.33,-229.94 -317.3,-235.97 C13.2@-266.27,-235.97
  Bottom Layer w15.75: -1750,-174.97 -1750,-106.97 -1675,-31.97 -1272.64,-31.97 -1212.64,-91.97 -1064.64,-91.97 -879.64,-276.97 -721.64,-276.97 -688,-243.33 v1@-688,-220.34 ; v1(-670.83,-70.58) -670.83,-144.8 -688.64,-162.61 v1(-688.64,-220.34) v1@-688,-220.34 ; v1@-670,-70.58 -670,102.06 -637,135.06 -637,305.66 v1@-637,310.03 ; P1.6@-272.01,-145.91 -272.01,-189.97 ; P2.1 24.99,-226.97 -6.62,-258.58 -94.03,-258.58 -162.64,-189.97 -272.01,-189.97 ; v1@-688,-220.34 -350.38,-220.34 -320.01,-189.97 -272.01,-189.97
VDD_EN: R23.2 U1.3 U5.58 | length 1639.1
  Top Layer w9.84: v1(-2074.61,-232.68) -2072.73,-234.56 -2039.66,-234.56 U1.3 ; v1(-1431.01,297.03) -1397,297.03 -1379.53,279.56 U5.58 ; v1(-1289.01,317.03) -1231.41,317.03 -1202.71,345.73 -1196.84,345.73 R23.2 ; R23.2@-1180.54,357.03 R23.2@-1172.54,349.03
  Top Layer w15.75: U1.3 U1.3@-2037,-236.42
  Bottom Layer w9.84: v1(-2074.61,-232.68) -2052.08,-210.14 -2052.08,-147.14 -2101.77,-97.44 -2101.77,64.57 -2051.67,114.66 -2051.67,255.99 -1988.23,319.44 -1451.41,319.44 -1401.59,269.61 -1336.43,269.61 v1(-1289.01,317.03)
VDD_FLT: U1.4 U5.57 | length 1647.8
  Top Layer w9.84: U5.57 v1@-1359.84,297.03
  Top Layer w15.75: v1(-2067,-346.97) U1.4@-2037.4,-346.97
  Bottom Layer w9.84: v1(-2067,-346.97) -2106.39,-346.97 -2193.9,-259.46 -2193.9,250 -2106.65,337.25 -1429.22,337.25 -1389.01,297.03 v1(-1359.64,297.03)
VREFO: U5.17
VrIn: C5.1 JP1.1 U1.5 U3.3 | length 584.1
  Top Layer w15.75: U1.5 -1946.75,-358.97 v1(-1935.01,-358.97) ; U3.3 -1784.84,-339.13 -1707.51,-339.13 v1(-1707.35,-338.97)
  Top Layer w19.68: v1(-1707.35,-338.97) -1676.69,-338.97 C5.1@-1676.45,-339.21
  Bottom Layer w15.75: v1(-1935.01,-358.97) -1933.94,-358.97 -1921.26,-346.28 -1762.66,-346.28 -1750.94,-358 -1712.72,-358 -1655.26,-300.54 JP1.1@-1655.26,-173
VROUT: C3.1 JP1.3 U3.2 | length 157.4
  Top Layer w15.75: U3.2@-1824.05,-229.79 -1824.05,-214.05 -1812.74,-202.74 -1812.74,-81.72 C3.1
XTAL: U5.32
XTAL32: U5.19
pads on no net: J1.A8 J1.B8 P2.9 P2.16 P2.18 P2.20

## Polygon pours and split planes (outlines as drawn)
GND on Top Layer "Top Layer-No Net" (solid, remove dead copper, pour order 8): -2224.41,-424.97 -2224.41,429.68 105,429.68 105,-424.97
3V3 on Top Layer "Top Layer-No Net" (solid, pour order 6): -1521.64,190.03 -1178.64,190.03 -1178.64,-150.97 -1521.64,-150.97
GND on Bottom Layer "Top Layer-No Net" (solid, remove dead copper, pour order 7): -2224.41,429.27 104.58,429.27 104.58,-424.97 -2224.41,-424.97

## Keep-outs
Keep-Out Layer:
  the board outline again, w3.94

## Silkscreen, mask and mechanical layers (free items; w line width, h text height)
Top Overlay:
  lines w5: -2116.4,-1.97 -2070.73,-1.97
  lines w10: -1018.51,-327.84 -1002.01,-327.84 ; -1002.01,-364.34 -1002.01,-294.34 ; -988.01,-354.34 -988.01,-305.34 ; -973.01,-340.34 -973.01,-318.34
  text "USB" at -1413.01,289.03 h40
  text "Rst" at -133.42,263.03 h50
  text "BDM" at -151.64,6.66 h50 r90
  text "SWD" at -80.64,5.66 h50 r90
  text "3V" at -1864.01,-217.02 h40 r90
  text "5V" at -1563.58,-217.02 h40 r90
  text "TVdd" at -222.37,-371.97 h35
Bottom Overlay:
  text ".Description" at 59.99,346.03 h35
  text ".ProjectRevision" at -438.01,286.03 h35
  text "Gnd" at 84.36,210.03 h30 r90
  text "BKGD" at -332.01,105.03 h30
  text "Gnd" at -227.01,105.03 h30
  text "T_3V3" at -1812.64,9.67 h30 r90
  text "TVdd" at -1734.64,-18.33 h30 r90
  text "T_5V" at -1651.64,-19.33 h30 r90
  text "Rst" at -60.64,-46.97 h30
  text "Rst" at -152.01,-56.97 h30
  text "Rx" at -422.01,-61.97 h30
  text "Rx" at -60.64,-92.97 h30
  text "Gnd" at 87.36,-114.97 h30 r90
  text "Tx" at -60.64,-144.97 h30
  text "SWCLK" at -60.64,-194.97 h30
  text "TPa" at -1102,-196.97 h30
  text "Tx" at -347.01,-223.97 h30
  text "Vdd" at -227.01,-223.97 h30
  text "SWD" at -60.64,-242.97 h30
  text "Vdd" at 75.36,-289.97 h30
  text "Gnd" at -1107,-339.97 h30
  text "3V3" at -1326,-340.97 h30

## Text inside footprints (layer, text, board x,y; h text height)
Logo1: Bottom Overlay "OSHW" at -900.01,50.03 h30; Bottom Overlay "o" at -1036.01,-52.97 h400